# EAGLE board shuriken (EAGLE 7.4.0)

Size 69.21 x 69.21 mm. Coordinates in mm from the lower left corner, seen from the top.
Copper layers (1*16): Top 0.035mm / dielectric 1.5mm / Bottom 0.035mm
Design rules "default": minimum track width 10mil, minimum drill 24mil, track to track 8mil, track to pad 8mil, pad to pad 8mil, via to via 8mil, smd to smd 8mil, copper to edge 40mil, drill to drill 8mil, minimum pad ring 10mil, minimum via ring 8mil, stop-mask expansion 4mil, vias tented up to drill 0mil, thermal gap 10mil

## Placement (x,y rotation side)
E$1  [HOOOK]  34.61,47.61 0 top
E$2  [HOOOK]  47.61,34.61 270 top
E$3  [HOOOK]  34.61,21.61 180 top
E$4  [HOOOK]  21.61,34.61 90 top

## Library data of the parts
E$1-E$4 = Components

## Text on the board
tRubout: PEACE THROUGH / SUPERIOR FIREPOWER